# Altium PCB PCB_Luciferin_Module_V2.1_ETH_final.pcbdoc
Units mil, origin at the board's own origin, x right, y up, seen from the top; angles counter-clockwise.
Board outline 3395 x 2720 mil, 2 copper layers (Top Layer, Bottom Layer); 29 components, 50 nets, 71 pads, 92 vias.
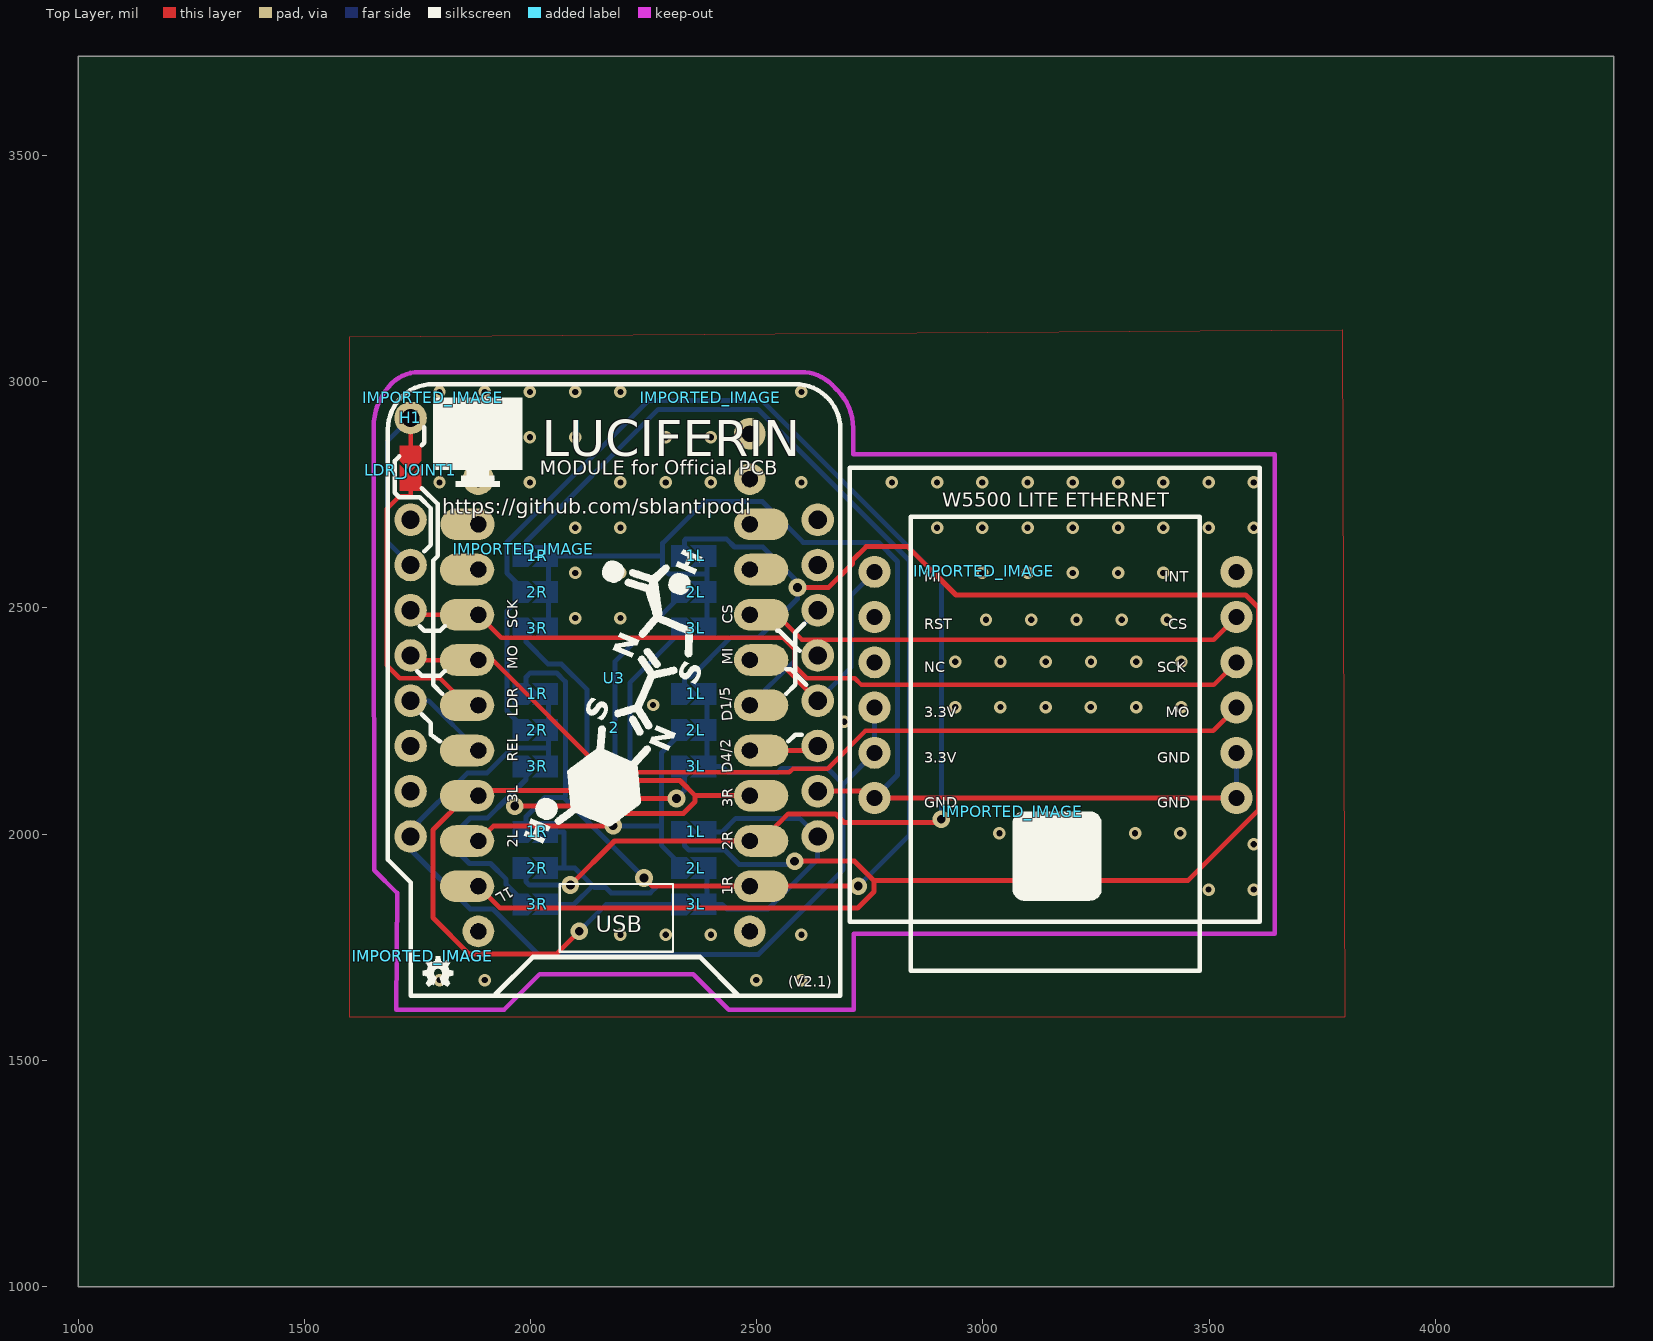
[diagram p0: Top Layer view]
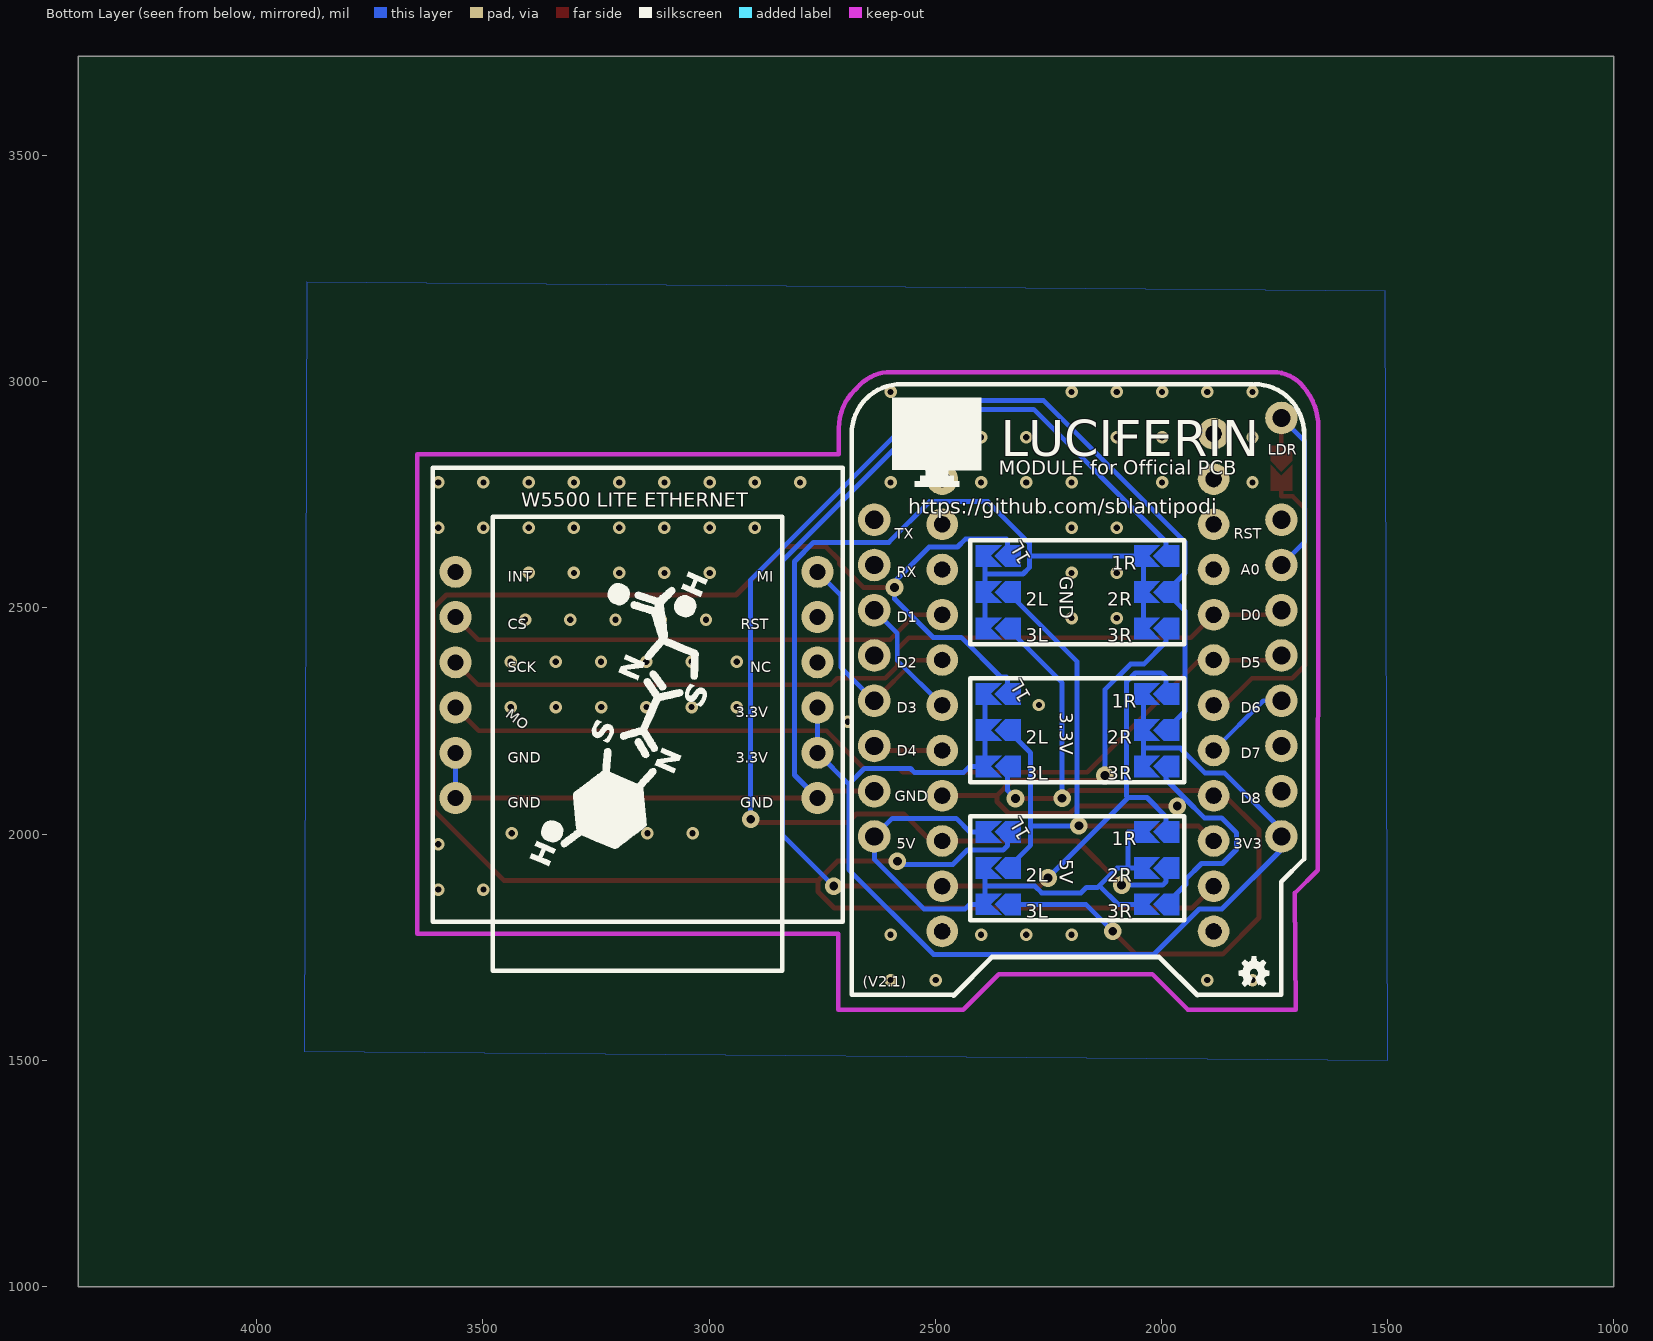
[diagram p1: Bottom Layer view, seen from below]

## Layer stack, top to bottom
Top Layer: signal copper (thickness not stored)
Dielectric: dielectric 12.6, FR-4, Dk 4.8
Bottom Layer: signal copper (thickness not stored)

## Board outline
4395,1000 1000,1000 1000,3720 4395,3720

## Components (designator, comment, footprint, x,y, rotation, side; value= is the part's Value field where it differs from the comment)
1L "Solder_joint" SB_SOLDER_JOINT#1 2365,2615 r0 top
1L "Solder_joint" SB_SOLDER_JOINT#1 2365,2005 r0 top
1L "Solder_joint" SB_SOLDER_JOINT#1 2365,2310 r0 top
1R "Solder_joint" SB_SOLDER_JOINT#1 2015,2615 r0 top
1R "Solder_joint" SB_SOLDER_JOINT#1 2015,2005 r0 top
1R "Solder_joint" SB_SOLDER_JOINT#1 2015,2310 r0 top
2 "SBLANT_TINYPICO_V3" TINYPICOV3 2185,2310 r90 top
2L "Solder_joint" SB_SOLDER_JOINT#1 2365,2535 r0 top
2L "Solder_joint" SB_SOLDER_JOINT#1 2365,1925 r0 top
2L "Solder_joint" SB_SOLDER_JOINT#1 2365,2230 r0 top
2R "Solder_joint" SB_SOLDER_JOINT#1 2015,2535 r0 top
2R "Solder_joint" SB_SOLDER_JOINT#1 2015,1925 r0 top
2R "Solder_joint" SB_SOLDER_JOINT#1 2015,2230 r0 top
3L "Solder_joint" SB_SOLDER_JOINT#1 2365,2455 r0 top
3L "Solder_joint" SB_SOLDER_JOINT#1 2365,1845 r0 top
3L "Solder_joint" SB_SOLDER_JOINT#1 2365,2150 r0 top
3R "Solder_joint" SB_SOLDER_JOINT#1 2015,2455 r0 top
3R "Solder_joint" SB_SOLDER_JOINT#1 2015,1845 r0 top
3R "Solder_joint" SB_SOLDER_JOINT#1 2015,2150 r0 top
H1 "HOLE 1.5" HOLEHOLE 1735,2920 r0 top
IMPORTED_IMAGE "IMPORTED_IMAGE" IMPORTED_IMAGE 3003.11,2580.71 r0 top
IMPORTED_IMAGE "IMPORTED_IMAGE" IMPORTED_IMAGE 1762.22,1730.04 r0 top
IMPORTED_IMAGE "IMPORTED_IMAGE" IMPORTED_IMAGE 2398.15,2964.96 r0 top
IMPORTED_IMAGE "IMPORTED_IMAGE" IMPORTED_IMAGE 1785,2965 r0 top
IMPORTED_IMAGE "IMPORTED_IMAGE" IMPORTED_IMAGE 1985.5,2630.39 r0 top
IMPORTED_IMAGE "IMPORTED_IMAGE" IMPORTED_IMAGE 3065.61,2050.04 r0 top
IMPORTED_IMAGE "IMPORTED_IMAGE" IMPORTED_IMAGE 1762.22,1730.04 r0 top
LDR_JOINT1 "Solder_joint" SB_SOLDER_JOINT#2 1735,2805 r270 top
U3 "LOLIN D1 MINI" WEMOS_D1_MINI_V2.3.0 2185,2345 r0 top

## Footprints (in the part's own frame and the unit in brackets; to place one, negate y for a bottom-side part, rotate by r counter-clockwise, add the part's x,y. Pads: shape width x height; smd on the part's side, far side on the other; paste and mask are expansions set on the pad)
HOLEHOLE [mil]
  round 72.01 hole 40 paste+0 mask+2: 1(0,0)
IMPORTED_IMAGE [mil]
SB_SOLDER_JOINT#1 [mil]
  Bottom Layer region: -19.94,-23.76 -20.08,-23.82 -53.54,-23.82 -53.68,-23.76 -53.74,-23.62 -53.74,23.62 -53.68,23.76 -53.54,23.82 -20.08,23.82 -19.94,23.76 3.68,0.14 3.74,0 3.68,-0.14
  Bottom Layer region: 45.51,-23.62 45.51,23.62 45.51,23.62 -11.26,23.62 -11.26,23.62 12.36,0 12.36,0 -11.26,-23.62 -11.26,-23.62
SB_SOLDER_JOINT#2 [mil]
  Top Layer region: -19.94,-23.76 -20.08,-23.82 -53.54,-23.82 -53.68,-23.76 -53.74,-23.62 -53.74,23.62 -53.68,23.76 -53.54,23.82 -20.08,23.82 -19.94,23.76 3.68,0.14 3.74,0 3.68,-0.14
  Top Layer region: 45.51,-23.62 45.51,23.62 45.51,23.62 -11.26,23.62 -11.26,23.62 12.36,0 12.36,0 -11.26,-23.62 -11.26,-23.62
TINYPICOV3 [mil]
  round 70 hole 35.44 slot 35.45 at 0 deg paste+0 mask+2: 3V3(-225,300) 4(-125,300) 5(-225,-300) 5V(-325,300) 14(-25,300) 15(75,300) 18(-325,-300) 19(-425,-300) 21(-25,-300) 22(-125,-300) 23(-525,-300) 25(375,300) 26(275,300) 27(175,300) 32(75,-300) 33(175,-300) BAT(-525,300) GND1(-425,300) GND2(375,-300) RST(275,-300)
  oval 70x120 smd paste+0 mask+2: 3V3(-225,325) 4(-125,325) 5(-225,-325) 5V(-325,325) 14(-25,325) 15(75,325) 18(-325,-325) 19(-425,-325) 21(-25,-325) 22(-125,-325) 25(375,324) 26(275,325) 27(175,325) 32(75,-325) 33(175,-326) GND1(-425,325) GND2(375,-325) RST(275,-325)
  silkscreen extent -570,-130 -420,120
WEMOS_D1_MINI_V2.3.0 [mil]
  round 72 hole 40 paste+0 mask+4: 3V3(-450,-350) 5V(450,-350) A0(-450,250) D0(-450,150) D1(450,150) D2(450,50) D3(450,-50) D4(450,-150) D5(-450,50) D6(-450,-50) D7(-450,-150) D8(-450,-250) GND(450,-250) RST(-450,350) RX(450,250) TX(450,350)
  silkscreen extent -500,-702 500,650

## Free pads (board coordinates)
  round 70.87 hole 35.43 paste+0 mask+2: 1(3560.59,2079.92) 2(3560.59,2179.92) 3(3560.59,2279.92) 4(3560.59,2379.92) 5(3560.59,2479.92) 6(3560.59,2579.92) 7(2760.59,2579.92) 8(2760.59,2479.92) 9(2760.59,2379.92) 10(2760.59,2279.92) 11(2760.59,2179.92) 12(2760.59,2079.92)
  round 70 hole 35.44 slot 35.45 at 90 deg paste+0 mask+2: 25(1885,2885) 26(1885,2785) GND2(2485,2885) RST(2485,2785)

## Via types
v1: diameter 27.56, hole 13.78, Top Layer to Bottom Layer, tented both sides, 80 vias
v2: diameter 39.37, hole 19.69, Top Layer to Bottom Layer, tented both sides, 12 vias

## Nets (pads, with @x,y where several pads share a name; then routed paths per layer and width w, separated by ;. In a path a pad name is that pad's centre, name@x,y a point inside that pad or via, vN(x,y) a via of type N, cw(c..) or ccw(c..) an arc to the next point about the centre after c; other vN are vias at no path point)
1_14: 2.14 | length 682.3
  Top Layer w10: 1735,2780 1735,2746.6 1709.95,2746.6 1682.3,2718.95 1682.3,2373.61 1710.91,2345 1800,2345 1860,2285 2.14@1885,2285
1_15: 2.15 pad.3 U3.D5 | length 1991.6
  Top Layer w10: U3.D5 1745,2385 1860,2385 1885,2385 1916.33,2385 2164.27,2137.06 2572.39,2137.06 2580.33,2145 2657.26,2145 2740.55,2228.29 3508.96,2228.29 pad.3
1_23: 2.23
1_26: 2.26 | length 25
  Top Layer w10: 2.26@1860,2585 2.26@1885,2585
1_27: 2.27 pad.4 U3.D0 | length 1936.9
  Top Layer w10: U3.D0 1745,2485 1860,2485 1885,2485 1935.5,2434.5 2558.86,2434.5 2584.49,2408.87 2584.49,2370.88 2610.37,2345 2716.69,2345 2731.77,2329.92 3510.59,2329.92 pad.4
1_32: 2.32 pad.7 U3.D3 | length 524.2
  Top Layer w10: 2.32@2485,2385 2510,2385 2545,2385 U3.D3
  Bottom Layer w10: U3.D3 2708.96,2368.96 2708.96,2528.29 pad.7
1_33: 2.33 pad.5 U3.D2 | length 1154
  Top Layer w10: 2.33@2485,2485 2511,2485 2545,2485 2600.08,2429.92 U3.D2@2635,2429.92 ; U3.D2 U3.D2@2635,2429.92 ; pad.5 3510.59,2429.92 U3.D2@2635,2429.92
1_BAT: 2.BAT
1_RST: 2.RST | length 25
  Top Layer w10: 2.RST@2485,2585 2.RST@2510,2585
NC1: pad.25
NC2: pad.GND2
NC3: pad.26
NC4: pad.RST
NC5: 2.25 | length 24
  Top Layer w10: 2.25@1861,2685 2.25@1885,2685
NC6: 2.GND2 | length 25
  Top Layer w10: 2.GND2@2485,2685 2.GND2@2510,2685
S$5398: 
S$5402: 
S$5406: 
S$5410: 
S$5474: 
S$5482: 
S$5486: 
S$7155: 
S$12763: 
S$13149: 
S$13153: 
S$16003: 
S$16040: 
S$16077: 
S$20682: 
S$43127: 
S$86624: 
SJ_5V_1_LEFT_1: 2.GND1 | length 4644.7
  Top Layer w11.02: 2.GND1@1860,1885 1885,1885 1933.45,1836.55 2723.02,1836.55 2759.37,1872.9 2759.37,1897.12 ; v2(2584.04,1940.26) 2716.23,1940.26 2759.37,1897.12 ; v2(2589.98,2545.63) 2590.06,2545.55 2659.33,2545.55 2711.71,2597.93 2711.71,2605.43 2741.95,2635.67 2833.86,2635.67 2940.73,2528.8 3580.9,2528.8 3609.77,2499.93 3609.77,2053.73 3453.16,1897.12 2759.37,1897.12
  Bottom Layer w11.02: 2340,2005 2340,1975 2350,1965 2429.36,1965 2460.91,1933.45 2577.23,1933.45 v2(2584.04,1940.26) ; 2340,2310 2340,2343.86 2343.21,2347.07 2354.86,2347.07 2442.79,2435 2505.07,2435 2589.98,2519.91 v2(2589.98,2545.63) 2589.98,2558.68 2513.66,2635 2450.98,2635 2433.83,2652.15 2343.21,2652.15 2340,2648.94 2340,2615
SJ_5V_2_LEFT_1: 2.5V | length 1370.2
  Top Layer w11.02: 2.5V@1860,1985 1885,1985 1918.61,2018.61 v2(2182.82,2018.61)
  Bottom Layer w11.02: v2(2182.82,2018.61) v2@2186.49,2018.61 ; 2340,1925 2289.4,1975.6 2289.4,2018.61 ; 2340,2230 2289.4,2179.4 2289.4,2018.61 ; 2340,2535 2186.49,2381.49 v2@2186.49,2018.61 ; v2@2186.49,2018.61 2289.4,2018.61
SJ_5V_3_LEFT_1: 2.3V3 | length 1913.7
  Top Layer w11.02: v2(2107.94,1785.52) 2057.27,1734.85 1864.91,1734.85 1784.5,1815.26 1784.5,2009.5 1860,2085 1885,2085 1896.57,2096.57 2202.53,2096.57 v2(2219.63,2079.47) 2220.13,2078.97 v2(2322.53,2078.97)
  Bottom Layer w11.02: v2(2107.94,1785.52) 2167.42,1845 2340,1845 ; v2(2219.63,2079.47) 2219.63,2334.63 2340,2455 ; v2(2322.53,2078.97) 2340,2096.44 2340,2150
SJ_GND_1_RIGHT_1: 2.19 | length 3166.1
  Top Layer w11.02: v2(2251.09,1903.38) 2269.47,1885 2485,1885 2510,1885 v2(2724.6,1885)
  Bottom Layer w11.02: 1990,2005 1990,2038.86 2032.2,2081.06 2073.41,2081.06 ; 1990,2310 1990,2347.03 1999.67,2356.7 2057.65,2356.7 2077.16,2337.19 2077.16,2084.81 2073.41,2081.06 ; 1990,2615 1990,2646.39 2282.82,2939.21 2502.92,2939.21 2837.31,2604.82 2837.31,1997.71 v2(2724.6,1885) ; v2(2251.09,1903.38) 2073.41,2081.06
SJ_GND_2_RIGHT_1: 2.18 | length 3278.3
  Top Layer w11.02: v2(2088.11,1887.42) 2185.69,1985 2485,1985 2510,1985 2570,2045 2674.1,2045 2693.2,2025.9 2901,2025.9 v2(2908.11,2033.01)
  Bottom Layer w11.02: 1990,1925 1990,1895 1997.58,1887.42 v2(2088.11,1887.42) ; 1990,2230 1947.81,2272.19 1947.81,2492.81 1990,2535 1947.81,2577.19 1947.81,2645.37 2260.62,2958.18 2512.21,2958.18 2908.11,2562.28 v2(2908.11,2033.01)
SJ_GND_3_RIGHT_1: 2.5 | length 1738.5
  Top Layer w11.02: v2(1965.33,2061.92) 2186.36,2061.92 2202.55,2045.73 2337.8,2045.73 2364.24,2072.17 2364.24,2085 ; v2(2125.35,2129.85) 2136.59,2118.61 2330.63,2118.61 2364.24,2085 ; 2.5@2510,2085 2485,2085 2364.24,2085
  Bottom Layer w11.02: v2(1965.33,2061.92) 1948.23,2079.03 ; 1990,1845 1946.26,1888.74 1946.26,1900.32 1911.58,1935 1865.33,1935 1834.29,1966.04 1834.29,2002.8 1867.59,2036.1 1905.3,2036.1 1948.23,2079.03 ; 1990,2150 1990,2120.8 1948.23,2079.03 ; 1990,2455 1990,2425.15 2039.2,2375.95 2068.74,2375.95 2125.35,2319.34 v2(2125.35,2129.85)
U1_3V3: pad.10 pad.11 U3.3V3 | length 2584.5
  Bottom Layer w11.02: 2040,2150 2040,2190 ; 2040,2310 2040,2230 2040,2190 ; 2390,2310 2390,2230 2390,2150 2423.91,2150 2437.36,2136.55 2546.37,2136.55 2554.82,2145 2657.11,2145 2691.39,2110.72 ; pad.10 pad.11 2691.39,2110.72 ; 2040,2190 1958.53,2190 1903.53,2135 1860.56,2135 1735,2009.44 U3.3V3 1735,1966.16 1866.16,1835 1916.03,1835 2016.54,1734.49 2504.22,1734.49 2691.39,1921.66 2691.39,2110.72
U1_5V: U3.5V | length 1306.3
  Bottom Layer w11.02: 2040,1845 2073.91,1845 2096.35,1845 2137.48,1886.13 ; 2040,1925 2073.91,1925 ; 2040,2005 2073.91,2005 2073.91,1925 ; 2390,1925 2390,1885 ; 2390,2005 2423.91,2005 2453.91,2035 2595,2035 U3.5V 2635,1944.37 2525.63,1835 2433.91,1835 2423.91,1845 2390,1845 2390,1885 ; 2073.91,1925 2098.6,1925 2137.48,1886.13 ; 2137.48,1886.13 2141.21,1882.39 2165.9,1882.39 2178.04,1870.25 2264.81,1870.25 2279.56,1885 2390,1885
U1_A0: H1.1 U3.A0 | length 457.5
  Top Layer w10: 1735,2830 H1.1
  Bottom Layer w10: U3.A0 1683.64,2646.36 1683.64,2868.64 H1.1
U1_D1: 2.21 U3.D1 | length 297.1
  Top Layer w10: 2.21@2485,2285 2.21@2510,2285
  Bottom Layer w10: 2.21@2485,2285 2583.94,2383.94 2583.94,2443.94 U3.D1
U1_D4: 2.22 U3.D4 | length 154.1
  Top Layer w10: 2.22@2485,2185 2510,2185 2625,2185 U3.D4
U1_D6: 2.4 U3.D6 | length 220.6
  Top Layer w10: 2.4@1860,2185 2.4@1885,2185
  Bottom Layer w10: U3.D6 1775,2295 2.4@1885,2185
U1_D7: U3.D7
U1_D8: U3.D8
U1_GND: pad.1 pad.2 pad.12 U3.GND | length 2917.8
  Top Layer w11.02: U3.GND 2745.51,2095 pad.12 pad.1
  Bottom Layer w11.02: 2040,2455 2040,2535 2040,2615 2073.91,2615 2292.38,2615 ; 2390,2455 2390,2535 2390,2575 ; 2390,2615 2390,2575 ; pad.12 2811.47,2130.8 2811.47,2602.85 2769.32,2645 2602.96,2645 2512.96,2735 2384,2735 2292.38,2643.38 2292.38,2615 ; pad.1 pad.2 ; 2292.38,2615 2292.38,2588.99 2306.37,2575 2390,2575
  other v1: 1798.93,1677.59 1898.93,1677.59 2498.92,1677.59 2598.92,1677.59 2198.93,1777.59 2298.93,1777.59 2398.92,1777.59 2598.92,1777.59 3498.92,1877.59 3598.92,1877.59 3598.92,1977.59 3036.55,2001.83 3136.55,2001.83 3236.55,2001.83 3336.55,2001.83 3436.55,2001.83 2693.84,2248.52 2938.78,2280.94 3038.78,2280.94 3138.78,2280.94 3238.78,2280.94 3338.78,2280.94 3438.78,2280.94 2270.93,2285.52 2939.06,2380.94 3039.06,2380.94 3139.06,2380.94 3239.06,2380.94 3339.06,2380.94 3439.06,2380.94 3007,2473.84 3107,2473.84 3207,2473.84 3307,2473.84 3407,2473.84 2098.93,2477.59 2198.93,2477.59 2098.93,2577.59 2198.93,2577.59 2998.92,2577.59 3098.92,2577.59 3198.92,2577.59 3298.92,2577.59 3398.92,2577.59 2098.93,2677.59 2198.93,2677.59 2898.92,2677.59 2998.92,2677.59 3098.92,2677.59 3198.92,2677.59 3298.92,2677.59 3398.92,2677.59 3498.92,2677.59 3598.92,2677.59 1798.93,2777.59 1998.93,2777.59 2198.93,2777.59 2298.93,2777.59 2398.92,2777.59 2598.92,2777.59 2798.92,2777.59 2898.92,2777.59 2998.92,2777.59 3098.92,2777.59 3198.92,2777.59 3298.92,2777.59 3398.92,2777.59 3498.92,2777.59 3598.92,2777.59 1798.93,2877.59 1998.93,2877.59 2098.93,2877.59 2298.93,2877.59 2398.92,2877.59 1798.93,2977.59 1898.93,2977.59 1998.93,2977.59 2098.93,2977.59 2198.93,2977.59 2598.92,2977.59
U1_RST: U3.RST
U1_RX: U3.RX
U1_TX: U3.TX

## Polygon pours and split planes (outlines as drawn)
U1_GND on Bottom Layer (solid): 1505,3200 3890,3220 3895,1520 1500,1500
U1_GND on Top Layer (solid): 1600,3100 3795,3115 3800,1595 2795,1595 1600,1595

## Keep-outs
Keep-Out Layer:
  lines w10 net S$16040: 1653.43,2900 cw(c1790,2900) 1693.43,2996.57 cw(c1753.79,2936.21) 1753.79,3021.57 ; 2598.43,3021.57 cw(c2598.43,2925) 2666.72,2993.28 ; 2678.43,2981.57 cw(c2593.93,2897.07) 2713.43,2897.07

## Silkscreen, mask and mechanical layers (free items; w line width, h text height)
Top Overlay:
  lines w10: 2706.26,1806.3 3611.77,1806.3 3611.77,2810.24 2706.26,2810.24 2706.26,1806.3 ; 2840.12,1698.03 3479.88,1698.03 3479.88,2701.97 2840.12,2701.97 2840.12,1698.03
  lines w10 net S$13149: 2565,2310 2585,2330 2585,2445 2605,2465
  lines w10 net S$13153: 2570,2205 2585,2220 2600,2220
  lines w10 net S$5398: 1755,2460 1765,2450 1800,2450 1810,2460
  lines w10 net S$5402: 1750,2360 1760,2350 1800,2350 1810,2360
  lines w10 net S$5406: 2545,2450 2550,2450 2595,2405
  lines w10 net S$5410: 2565,2365 2575,2365 2610,2330
  lines w10 net S$5474: 1760,2860 1765,2865 1765,2900
  lines w10 net S$5482: 1760,2765 1795,2730 1795,2615 1785,2605 1785,2330 1805,2310
  lines w10 net S$5486: 1720,2745 1755,2745 1780,2720 1780,2640 1765,2625
  lines w10 net S$7155: 1710,2835 1700,2825 1700,2755 1710,2745 1720,2745
  lines w10 net U1_D6: 1760,2265 1780,2245 1780,2220 1800,2205
  lines w11.02 net S$86624: 1922.76,1643.2 1922.76,1645.9 2005.06,1728.2 2375.06,1728.2 2459.76,1643.2
  text "LUCIFERIN" at 2025,2835.04 h80
  text "MODULE for Official PCB" at 2020,2794.29 h31.5
  text "W5500 LITE ETHERNET" at 2910,2724.25 h31.5
  text "https://github.com/sblantipodi" at 1805,2708.31 h33.47
  text "MI" at 2870,2558.19 h23.62
  text "INT" at 3401.1,2558.19 h23.62
  text "CS" at 2446.81,2465 h23.62 r90
  text "SCK" at 1971.81,2455 h23.62 r90
  text "RST" at 2870,2453.19 h23.62
  text "CS" at 3410,2453.19 h23.62
  text "MI" at 2446.81,2375 h23.62 r90
  text "MO" at 1971.81,2365 h23.62 r90
  text "NC" at 2870,2358.19 h23.62
  text "SCK" at 3385,2358.19 h23.62
  text "LDR" at 1971.81,2260 h23.62 r90
  text "3.3V" at 2870,2258.19 h23.62
  text "MO" at 3403.9,2258.19 h23.62
  text "D1/5" at 2446.77,2251.03 h23.62 r95
  text "REL" at 1971.81,2160 h23.62 r90
  text "3.3V" at 2870,2158.19 h23.62
  text "GND" at 3385,2158.19 h23.62
  text "D4/2" at 2446.78,2135.82 h23.62 r94
  text "3L" at 1971.81,2070 h23.62 r90
  text "3R" at 2446.81,2060 h23.62 r90
  text "GND" at 2870,2058.19 h23.62
  text "GND" at 3385,2058.19 h23.62
  text "2L" at 1971.81,1970 h23.62 r90
  text "2R" at 2446.81,1965 h23.62 r90
  text "1L" at 1954.09,1885.23 h23.62 r210
  text "1R" at 2446.81,1865 h23.62 r90
  text "(V2.1)" at 2570,1663.19 h23.62
Bottom Overlay:
  lines w10: 1950,1809.68 2422.44,1809.68 2422.44,2040 1950,2040 1950,1809.68 ; 1950,2114.68 2422.44,2114.68 2422.44,2345 1950,2345 1950,2114.68 ; 1950,2419.68 2422.44,2419.68 2422.44,2650 1950,2650 1950,2419.68 ; 2705,1806.06 3610.51,1806.06 3610.51,2810 2705,2810 2705,1806.06 ; 2838.86,1697.79 3478.62,1697.79 3478.62,2701.73 2838.86,2701.73 2838.86,1697.79
  lines w10 net S$12763: 1685,2885 cw(c1795,2885) 1795,2995 ; 1685,2895 1685,1945 1735,1895 1735,1645 1920,1645 ; 1800,2995 2555,2995 ; 2460,1645 2685,1645 2685,2890 ; 2535,2995 2575,2995 cw(c2575,2885) 2685,2885
  lines w11.02 net S$86624: 1920,1645 1922.76,1645.9 2005.06,1728.2 2375.06,1728.2 2459.76,1643.2
  text "LDR" at 1765,2838.19 h23.62
  text "LUCIFERIN" at 2355,2835 h80
  text "MODULE for Official PCB" at 2360,2794.25 h31.5
  text "W5500 LITE ETHERNET" at 3415,2724.25 h31.5
  text "https://github.com/sblantipodi" at 2560,2708.27 h33.47
  text "GND" at 2225,2570 h30 r90
  text "MI" at 2895,2558.19 h23.62
  text "INT" at 3445,2558.19 h23.62
  text "RST" at 2930,2453.19 h23.62
  text "CS" at 3445,2453.19 h23.62
  text "NC" at 2908.9,2358.19 h23.62
  text "SCK" at 3445,2358.19 h23.62
  text "3.3V" at 2225,2270 h30 r90
  text "MO" at 3452.11,2260.57 h23.62 r37
  text "3.3V" at 2941.4,2258.19 h23.62
  text "3.3V" at 2941.4,2158.19 h23.62
  text "GND" at 3445,2158.19 h23.62
  text "GND" at 2931,2058.19 h23.62
  text "GND" at 3445,2058.19 h23.62
  text "5V" at 2225,1945 h30 r90
  text "(V2.1)" at 2660,1663.19 h23.62
Document:
  lines w0.1: 2697.49,2359.99 2697.51,2360.01

## Text inside footprints (layer, text, board x,y; h text height)
2: Top Overlay "USB" at 2144.5,1783.5 h36
U3: Bottom Overlay "D8" at 1825,2068.19 h23.62; Bottom Overlay "D7" at 1825,2168.19 h23.62; Bottom Overlay "D6" at 1825,2268.19 h23.62; Bottom Overlay "D5" at 1825,2368.19 h23.62; Bottom Overlay "D0" at 1825,2473.19 h23.62; Bottom Overlay "A0" at 1825,2573.19 h23.62; Bottom Overlay "RST" at 1840,2653.19 h23.62; Bottom Overlay "3V3" at 1840,1968.19 h23.62; Bottom Overlay "5V" at 2585,1968.19 h23.62; Bottom Overlay "GND" at 2590,2073.19 h23.62; Bottom Overlay "D4" at 2585,2173.19 h23.62; Bottom Overlay "D3" at 2585,2268.19 h23.62; Bottom Overlay "D2" at 2585,2368.19 h23.62; Bottom Overlay "D1" at 2585,2468.19 h23.62; Bottom Overlay "RX" at 2585,2568.19 h23.62; Bottom Overlay "TX" at 2590,2653.19 h23.62